# EAGLE board 18500_pack_v2 (EAGLE 9.6.2)
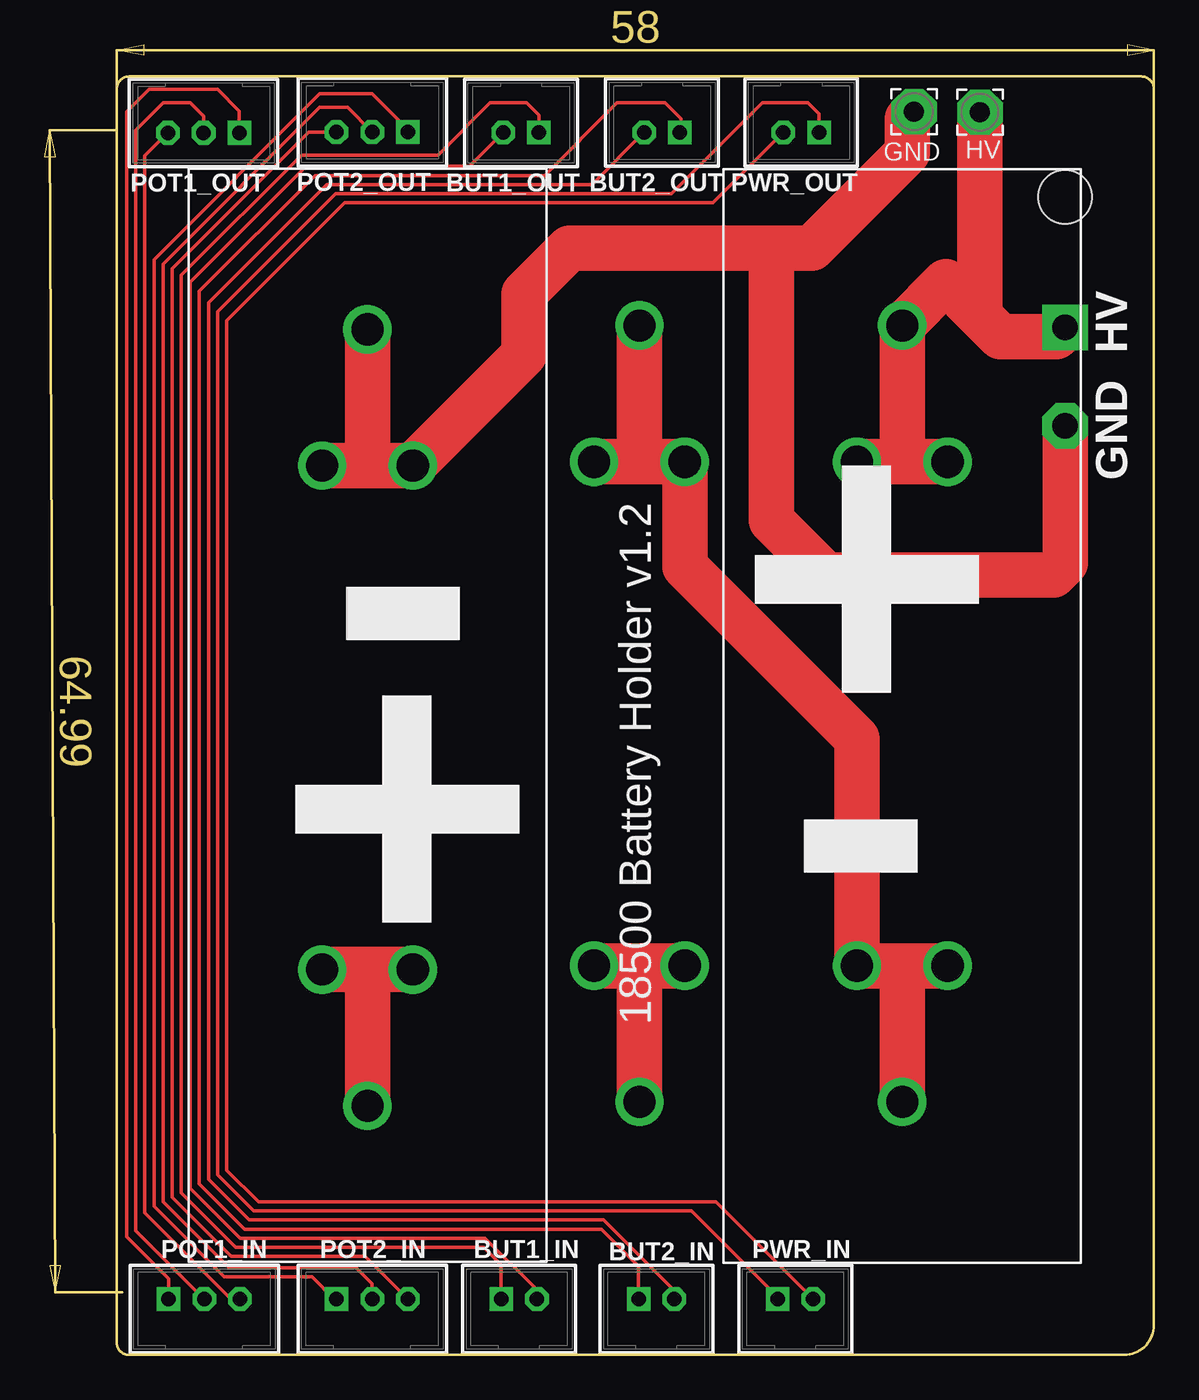
[diagram p0: board, top side]
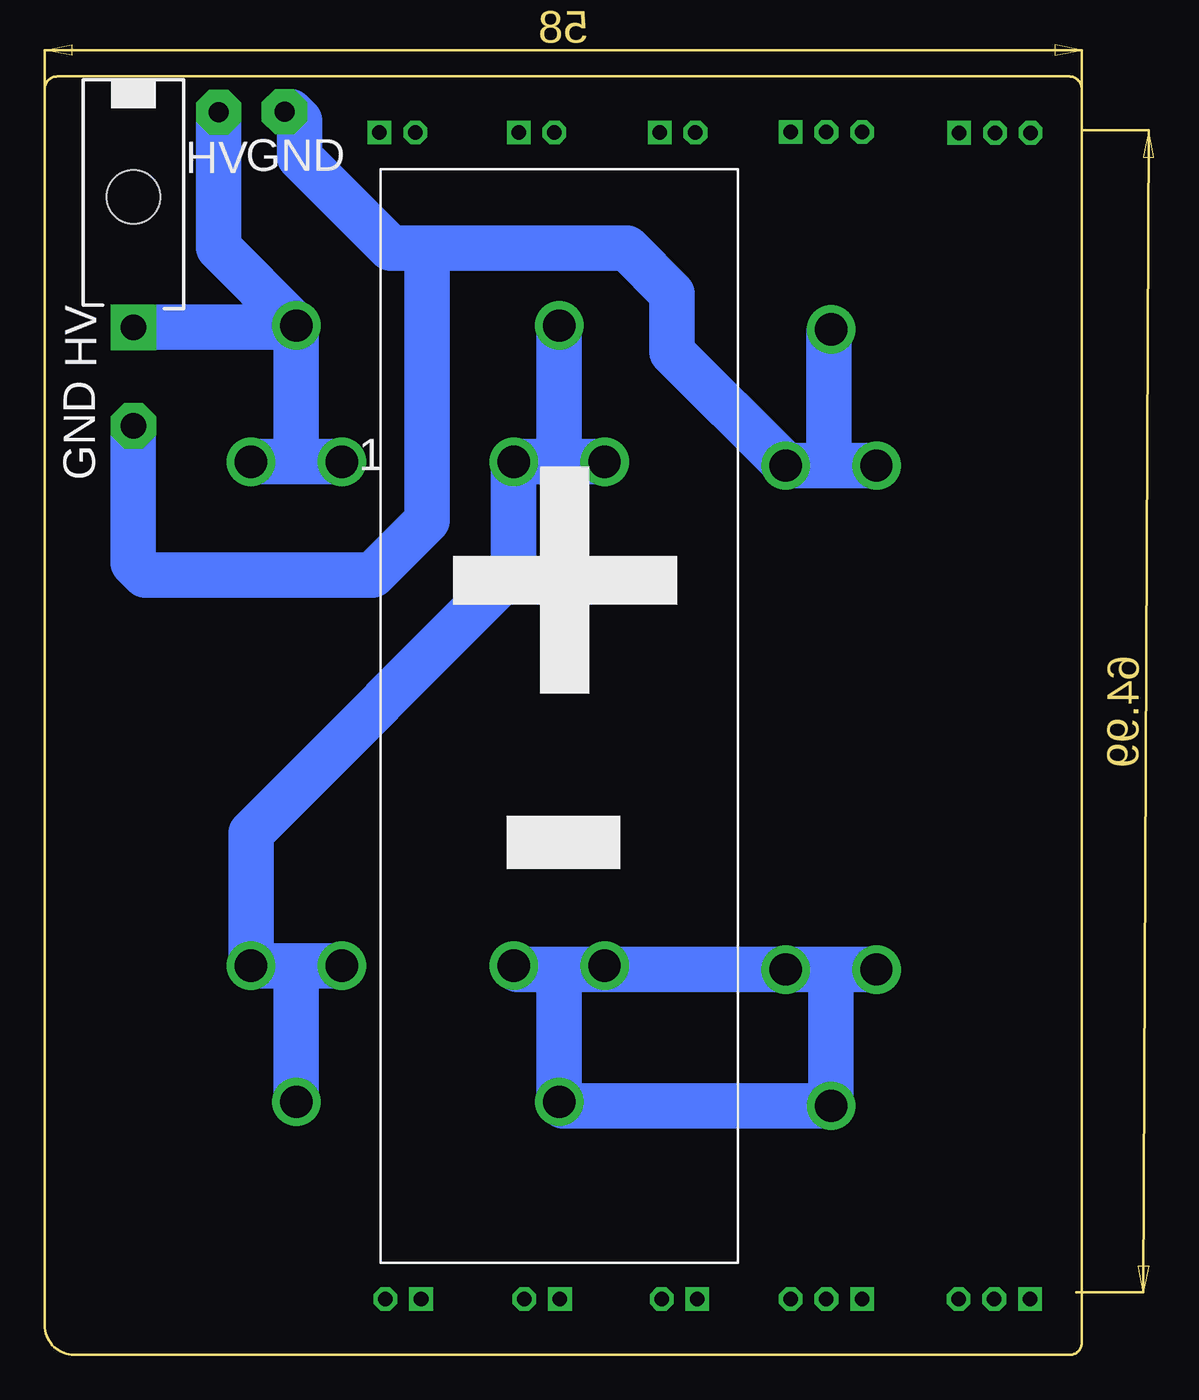
[diagram p1: board, bottom side, seen from below]

Size 58 x 71.49 mm. Coordinates in mm from the lower left corner, seen from the top.
Outline: 0,70.79 0,0.66 arc90 0.66,0 56.34,0 arc90 58,1.66 58,70.79 arc90 57.3,71.49 0.7,71.49 arc90 0,70.79
Copper layers (1*16): Top 0.035mm / dielectric 1.5mm / Bottom 0.035mm
Design rules "SeeedStudio_2layer_DRU_no_angle_20140221": minimum track width 6mil, minimum drill 12mil, track to track 6mil, track to pad 6mil, pad to pad 6mil, via to via 6mil, smd to smd 0mil, copper to edge 10mil, drill to drill 10mil, minimum pad ring 10mil, minimum via ring 6mil, stop-mask expansion 2mil, vias tented up to drill 100mil, thermal gap 10mil

## Footprints (pad centres in the part's own frame; a part is rotated, then mirrored left to right if it is on the bottom)
B2B-PH-K = drill 0.813 square: 1 -1,0 | drill 0.813 octagon: 2 1,0
2,54/1,1 = drill 1.118 pad 2.54 octagon: 1 0,0
39-30-?02? = drill 1.422 pad 2.54 square: 1 0,0 | drill 1.422 pad 2.54 octagon: 2 0,5.512 | hole 3: 0,-7.3
B3B-PH-K = drill 0.813 square: 1 -2,0 | drill 0.813 octagon: 2 0,0; 3 2,0
3PINBATTERY_CLIP_1_CELL_18500 = drill 1.8: P$1 0,0; P$2 7.62,2.54; P$3 7.62,-2.54; P$4 35.801,2.54; P$5 35.801,-2.54; P$6 43.421,0

## Placement (x,y rotation side)
BUT1_IN  B2B-PH-K  [B2B-PH-K]  22.5,3.12 0 top
BUT1_OUT  B2B-PH-K  [B2B-PH-K]  22.61,68.35 180 top
BUT2_IN  B2B-PH-K  [B2B-PH-K]  30.18,3.12 0 top
BUT2_OUT  B2B-PH-K  [B2B-PH-K]  30.49,68.37 180 top
GND  [2,54/1,1]  44.59,69.52 0 top
HV  [2,54/1,1]  48.27,69.49 0 top
P1  39-30-02?  [39-30-?02?]  53.04,57.46 180 bottom
POT1_IN  B3B-PH-K  [B3B-PH-K]  4.89,3.12 0 top
POT1_OUT  B3B-PH-K  [B3B-PH-K]  4.85,68.34 180 top
POT2_IN  B3B-PH-K  [B3B-PH-K]  14.28,3.12 0 top
POT2_OUT  B3B-PH-K  [B3B-PH-K]  14.28,68.38 180 top
PWR_IN  B2B-PH-K  [B2B-PH-K]  37.95,3.12 0 top
PWR_OUT  B2B-PH-K  [B2B-PH-K]  38.27,68.36 180 top
U$1  18500_CLIP_HOLDER_1_CELL  [3PINBATTERY_CLIP_1_CELL_18500]  43.92,57.56 270 top
U$2  18500_CLIP_HOLDER_1_CELL  [3PINBATTERY_CLIP_1_CELL_18500]  29.23,57.56 270 bottom
U$3  18500_CLIP_HOLDER_1_CELL  [3PINBATTERY_CLIP_1_CELL_18500]  14.02,13.93 90 top

## Library data of the parts
BUT1_IN BUT1_OUT BUT2_IN BUT2_OUT POT1_IN POT1_OUT POT2_IN POT2_OUT PWR_IN PWR_OUT = con-jst-ph
GND HV = wirepad
P1 = con-molex-mini-fit
U$1-U$3 = nathans-custom-parts

## Nets
GND: GND.1 P1.2 U$3.P$4 U$3.P$5 U$3.P$6
HV: HV.1 P1.1 U$1.P$1 U$1.P$2 U$1.P$3
N$1: U$1.P$4 U$1.P$5 U$1.P$6 U$2.P$1 U$2.P$2 U$2.P$3
N$2: U$2.P$4 U$2.P$5 U$2.P$6 U$3.P$1 U$3.P$2 U$3.P$3
N$3: PWR_IN.2 PWR_OUT.2
N$4: PWR_IN.1 PWR_OUT.1
N$5: BUT1_IN.2 BUT1_OUT.2
N$6: BUT1_IN.1 BUT1_OUT.1
N$7: BUT2_IN.2 BUT2_OUT.2
N$8: BUT2_IN.1 BUT2_OUT.1
N$9: POT1_IN.1 POT1_OUT.1
N$10: POT1_IN.2 POT1_OUT.2
N$11: POT1_IN.3 POT1_OUT.3
N$12: POT2_IN.1 POT2_OUT.1
N$13: POT2_IN.2 POT2_OUT.2
N$14: POT2_IN.3 POT2_OUT.3

## Tracks (layer width: path | path; a pad name or v marks a point on that pad's centre or on a via)
GND
  Top 2.54: U$3.P$4 14.02,49.73 | 14.02,49.73 U$3.P$5 22.78,55.95 22.78,59.35 25.32,61.89 36.62,61.89 | U$3.P$6 14.02,49.73 | 36.62,61.89 38.87,61.89 44.21,67.23 44.21,69.14 GND.1 | P1.2 53.04,44.27 52.37,43.6 39.67,43.6 36.62,46.65 36.62,61.89
  Bottom 2.54: U$3.P$4 14.14,49.73 | 14.14,49.73 U$3.P$5 22.9,56.07 22.9,59.35 25.44,61.89 36.62,61.89 | U$3.P$6 14.14,57.22 14.14,49.73 | GND.1 44.25,69.52 43.73,69 43.73,66.97 38.65,61.89 36.62,61.89 | 36.62,61.89 36.62,46.65 39.67,43.6 52.37,43.6 53.04,44.27 P1.2
HV
  Top 2.54: U$1.P$3 43.92,49.94 | 43.92,49.94 U$1.P$2 | 43.92,49.94 U$1.P$1 46.36,60 48.27,58.1 | HV.1 48.27,58.1 | P1.1 52.53,56.95 49.41,56.95 48.27,58.1
  Bottom 2.54: U$1.P$3 43.73,49.94 | 43.73,49.94 U$1.P$2 | U$1.P$1 43.92,50.14 43.73,49.94 | U$1.P$1 48.27,61.91 HV.1 | P1.1 44.03,57.46 U$1.P$1
N$1
  Top 2.54: U$1.P$6 43.92,21.76 | 43.92,21.76 U$1.P$5 41.38,34.46 31.77,44.08 U$2.P$3 29.23,49.94 | U$1.P$4 43.92,21.76 | U$2.P$2 29.23,49.94 | U$2.P$1 29.23,49.94
  Bottom 2.54: U$2.P$2 29,49.94 | 29,49.94 U$2.P$3 31.77,43.89 46.47,29.19 U$1.P$4 44.24,21.76 | U$2.P$1 29.23,50.17 29,49.94 | U$1.P$5 44.24,21.76 | U$1.P$6 43.92,21.45 44.24,21.76
N$2
  Top 2.54: U$3.P$1 14.02,21.55 | 14.02,21.55 U$3.P$2 | U$3.P$3 14.02,21.55 | U$2.P$6 29.23,21.76 | 29.23,21.76 U$2.P$4 | U$2.P$5 29.23,21.76
  Bottom 2.54: U$3.P$2 14.14,21.55 | 14.14,21.55 U$3.P$3 26.47,21.55 | 26.47,21.55 U$2.P$4 | U$2.P$5 31.55,21.55 29.38,21.55 | 29.38,21.55 26.47,21.55 | 29.38,21.55 29.23,21.39 U$2.P$6 29.01,13.93 U$3.P$1 14.02,21.42 14.14,21.55
N$3
  Top 0.203: PWR_IN.2 33.51,8.55 7.92,8.55 6.14,10.33 6.14,57.83 12.74,64.43 33.34,64.43 PWR_OUT.2
N$4
  Top 0.203: PWR_IN.1 36.95,3.24 32.15,8.04 7.66,8.04 5.63,10.08 5.63,58.34 12.24,64.94 31.03,64.94 36.11,70.02 38.65,70.02 39.27,69.4 PWR_OUT.1
N$5
  Top 0.203: BUT1_IN.2 23.5,3.62 20.6,6.52 6.9,6.52 4.11,9.31 4.11,59.99 10.59,66.46 19.72,66.46 BUT1_OUT.2
N$6
  Top 0.203: BUT1_IN.1 21.5,5.02 20.51,6.01 6.65,6.01 3.6,9.06 3.6,60.37 10.33,67.1 17.95,67.1 20.87,70.02 22.9,70.02 23.61,69.32 BUT1_OUT.1
N$7
  Top 0.203: BUT2_IN.2 31.18,3.58 27.22,7.54 7.41,7.54 5.12,9.82 5.12,58.84 11.73,65.45 26.57,65.45 BUT2_OUT.2
N$8
  Top 0.203: BUT2_IN.1 29.18,4.94 27.09,7.03 7.16,7.03 4.62,9.57 4.62,59.48 11.09,65.96 23.92,65.96 27.98,70.02 30.65,70.02 31.54,69.13 31.54,68.42 BUT2_OUT.1
N$9
  Top 0.203: POT1_IN.1 2.89,4.26 0.55,6.6 0.55,69.51 1.82,70.78 5.63,70.78 6.85,69.56 POT1_OUT.1
N$10
  Top 0.203: POT1_IN.2 1.06,6.95 1.06,68.5 2.58,70.02 4.11,70.02 4.85,69.28 POT1_OUT.2
N$11
  Top 0.203: POT1_IN.3 6.38,3.12 1.57,7.93 1.57,67.06 POT1_OUT.3
N$12
  Top 0.203: POT2_IN.1 12.15,3.12 10.91,4.36 6.01,4.36 2.08,8.3 2.08,61.26 11.35,70.53 14.27,70.53 16.28,68.52 POT2_OUT.1
N$13
  Top 0.203: POT2_IN.2 14.27,3.13 14.27,3.98 13.38,4.87 6.27,4.87 2.58,8.55 2.58,61 11.35,69.77 12.9,69.77 POT2_OUT.2
N$14
  Top 0.203: POT2_IN.3 13.89,5.5 6.39,5.5 3.09,8.81 3.09,60.75 10.73,68.38 POT2_OUT.3

## Text on the board
tNames: HV | GND | - | + | + | - | 18500 Battery Holder v1.2
bNames: GND | HV | HV | GND | 1 | + | -